# Altium PCB Spinn5PowerCurrentShunt.PcbDoc
Units mil, origin at the board's own origin, x right, y up, seen from the top; angles counter-clockwise.
Board outline 930 x 1995 mil, 2 copper layers (Top Layer, Bottom Layer); 14 components, 8 nets, 62 pads, 0 vias.
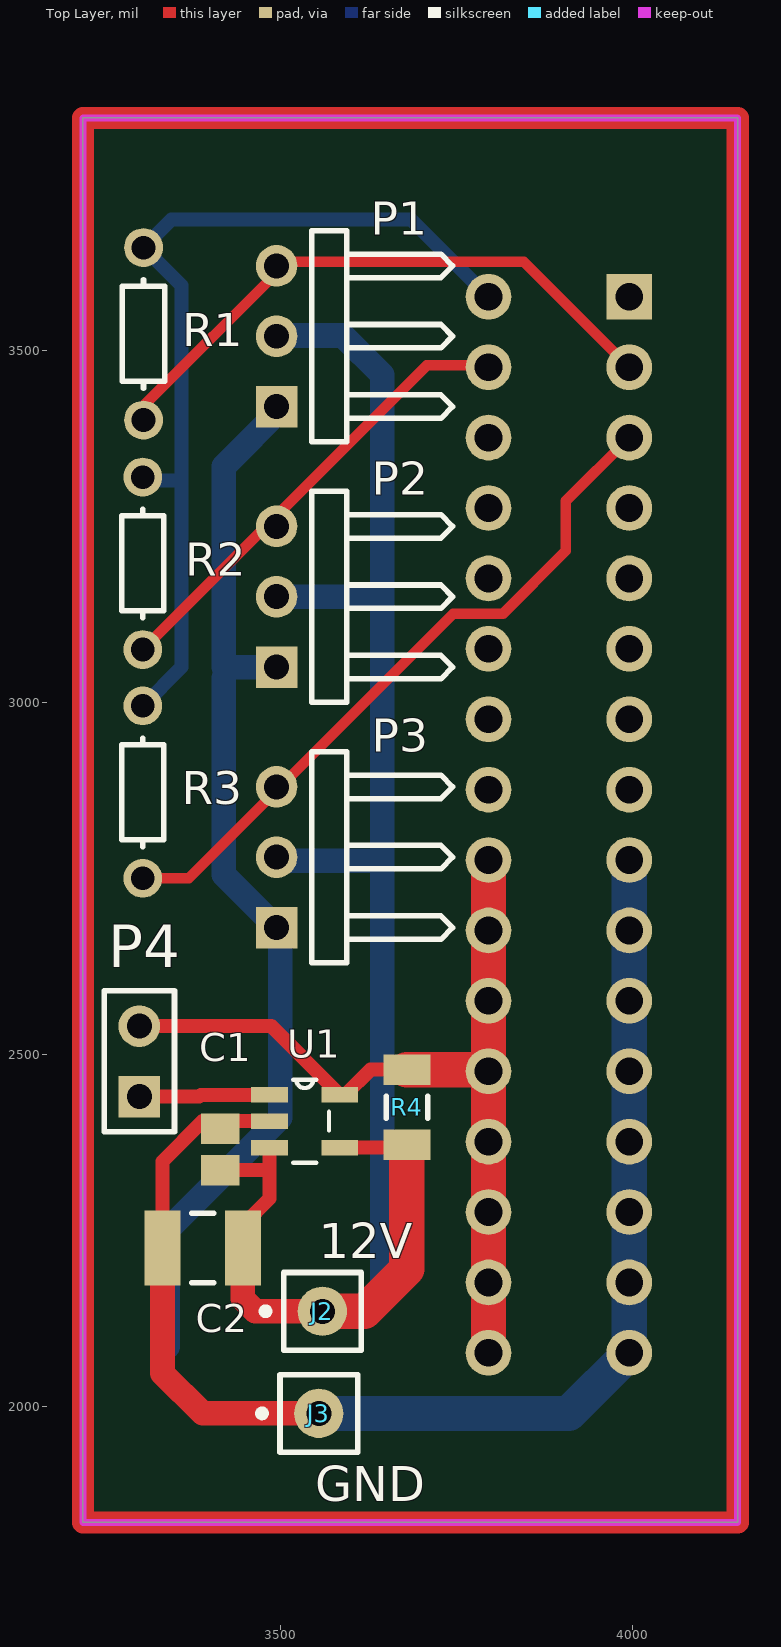
[diagram p0: Top Layer view]
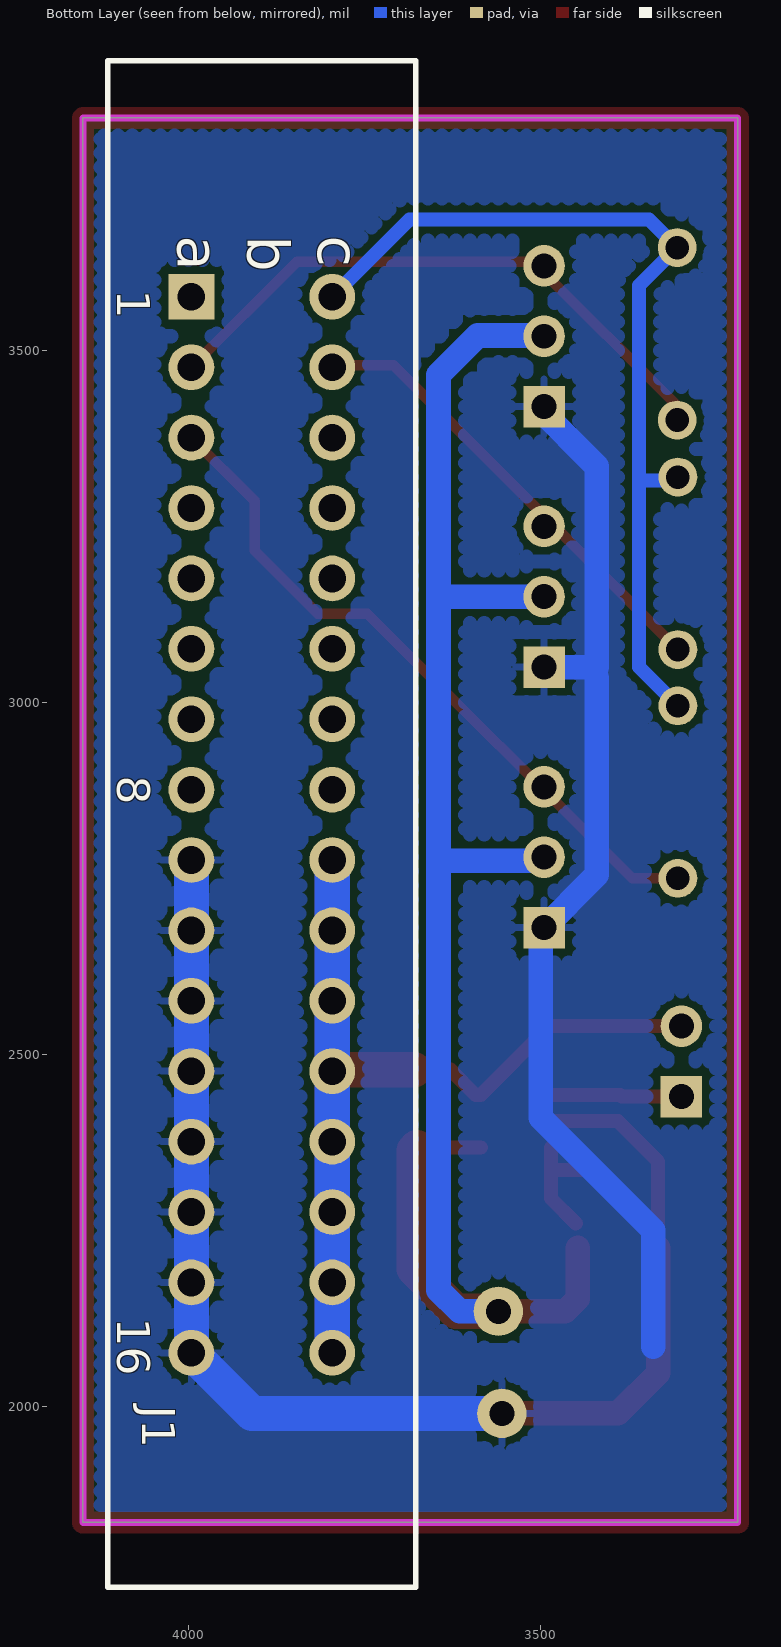
[diagram p1: Bottom Layer view, seen from below]
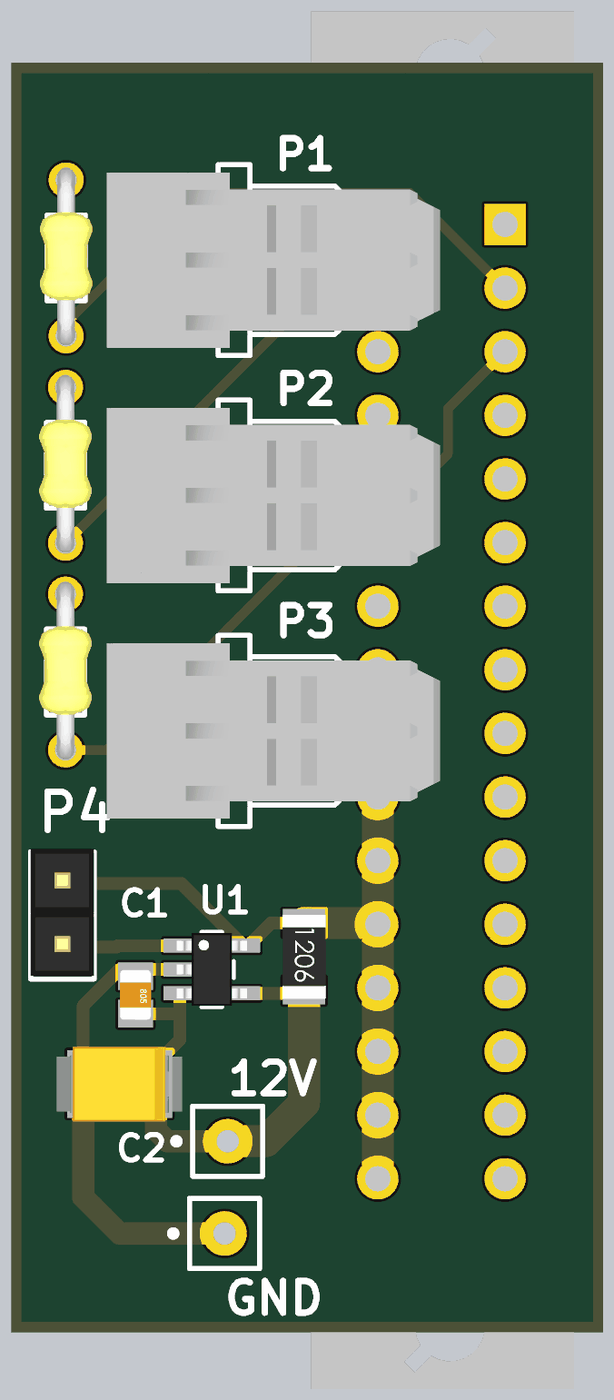
[diagram p2: 3D render of the assembled board from above, using the file's embedded part models]

## Layer stack, top to bottom
Top Solder: solder mask 0.4, Solder Resist, Dk 3.5
Top Layer: signal copper 1.4
Dielectric 1: dielectric 12.6, FR-4, Dk 4.8
Bottom Layer: signal copper 1.4
Bottom Solder: solder mask 0.4, Solder Resist, Dk 3.5

## Board outline
3220,1835 3220,3830 4150,3830 4150,1835

## Design rules (kind name [scope] priority, off if disabled: settings)
Clearance [All] p1: gap=10
MinimumSolderMaskSliver [All] p1: minsoldermaskwidth=7
PolygonConnect [All] p1: connectstyle=Relief reliefconductorwidth=10 reliefentries=4 polygonreliefangle="90 Angle" airgapwidth=10
RoutingVias [All] p1: holewidth=28 width=50 viastyle="Through Hole" minholewidth=28 minwidth=50 maxholewidth=28 maxwidth=50
SilkToSolderMaskClearance [IsPad] p1: minsilkscreentomaskgap=8 clearancetoexposedcopper=TRUE
SolderMaskExpansion [All] p1: expansion=4
Width [All] p1: maxlimit=50 minlimit=10 preferedwidth=10 minimp=50.000000 maximp=50.000000 favimp=50.000000
28 further rules are at their usual default settings.

## Components (designator, comment, footprint, x,y, rotation, side; value= is the part's Value field where it differs from the comment)
C1 "Cap" C0805 3415,2365 r270 top
C2 "Cap Pol1" C1210_N 3390,2225 r180 top
J1 "09 23 248 6824" 0923248X824 3896,2826 r270 bottom
J2 "Socket" PIN1 3560,2135 r90 top
J3 "Socket" PIN1 3555,1990 r90 top
P1 "Header 3H" HDR1X3H 3495,3420 r90 top
P2 "Header 3H" HDR1X3H 3495,3050 r90 top
P3 "Header 3H" HDR1X3H 3495,2680 r90 top
P4 "Header 2" HDR1X2 3300,2440 r90 top
R1 "Res1" AXIAL-0.3 3306,3491 r90 top
R2 "Res1" AXIAL-0.3 3305,3165 r90 top
R3 "Res1" AXIAL-0.3 3305,2840 r90 top
R4 "Res1" C1206 3680,2425 r270 top
U1 "MAX4376FAUK+" 21-0057F 3535,2405 r0 top

## Footprints (in the part's own frame and the unit in brackets; to place one, negate y for a bottom-side part, rotate by r counter-clockwise, add the part's x,y. Pads: shape width x height; smd on the part's side, far side on the other; paste and mask are expansions set on the pad)
21-0057F [mil]
  rect 52x22 smd: 1(-50,37.4) 2(-50,0) 3(-50,-37.4) 4(50,-37.4) 5(50,37.4)
  silkscreen extent -16,-59 34,59, body extent -55,-57 55,57, height 57
0923248X824 [mm] "Connector; DIN 41612, Type 2C, Thru-Hole; Rows a+b+c, 48 Position; Vertical"
  rect 1.65x1.65 hole 1: A1(-19.05,-2.54)
  round 1.65 hole 1: A2(-16.51,-2.54) A3(-13.97,-2.54) A4(-11.43,-2.54) A5(-8.89,-2.54) A6(-6.35,-2.54) A7(-3.81,-2.54) A8(-1.27,-2.54) A9(1.27,-2.54) A10(3.81,-2.54) A11(6.35,-2.54) A12(8.89,-2.54) A13(11.43,-2.54) A14(13.97,-2.54) A15(16.51,-2.54) A16(19.05,-2.54) C1(-19.05,2.54) C2(-16.51,2.54) C3(-13.97,2.54) C4(-11.43,2.54) C5(-8.89,2.54) C6(-6.35,2.54) C7(-3.81,2.54) C8(-1.27,2.54) C9(1.27,2.54) C10(3.81,2.54) C11(6.35,2.54) C12(8.89,2.54) C13(11.43,2.54) C14(13.97,2.54) C15(16.51,2.54) C16(19.05,2.54)
  silkscreen extent -27.56,-5.55 27.5,5.55, body extent -27.56,-5.29 27.44,5.21, height 11.59
AXIAL-0.3 [mm] "Axial Device, Thru-Hole; 2 Leads; 0.3 in Pin Spacing"
  round 1.4 hole 0.85: 1(-2.286,0) 2(3.937,0)
  silkscreen extent -1.14,-0.76 2.77,0.76, body extent -2.66,-1.05 4.44,1.05, height 1.75
C0805 [mm] "Chip Capacitor, Body 2.0x1.3mm, IPC High Density"
  rect 1.1x1.4 smd: 1(-0.75,0) 2(0.75,0)
  body extent -1,-0.62 1,0.63, height 0.78
C1206 [mm] "Chip Capacitor, Body 3.2x1.6mm, IPC High Density"
  rect 1.1x1.7 smd: 1(-1.35,0) 2(1.35,0)
  silkscreen extent -0.4,-0.75 0.4,0.75, body extent -1.67,-0.86 1.68,0.87, height 0.85
C1210_N [mm] "Chip Capacitor, Body 3.2x2.5mm, IPC Medium Density"
  rect 1.3x2.7 smd: 1(-1.45,0) 2(1.45,0)
  silkscreen extent -0.4,-1.25 0.4,1.25, body extent -2.49,-1.5 2.51,1.5, height 2.11
HDR1X2 [mm] "Connector; Header; 2 Position"
  rect 1.5x1.5 hole 0.9: 1(0,0)
  round 1.5 hole 0.9: 2(2.54,0)
  silkscreen extent -1.27,-1.27 3.81,1.27, body extent -1.14,-1.27 3.94,1.27, height 8.48
HDR1X3H [mm] "Connector; Header; 3 Position; Right Angle"
  rect 1.5x1.5 hole 0.9: 1(0,0)
  round 1.5 hole 0.9: 2(2.54,0) 3(5.08,0)
  silkscreen extent -1.27,-6.35 6.35,-1.27, body extent -0.96,-10.13 6.04,3.18, height 6.33
PIN1 [mil] "Connector; Plug"
  round 70 hole 35.43: 1(0,0)
  silkscreen extent -55,-55 55,86

## Part data
C1: library part "Cap Semi", "Capacitor (Semiconductor SIM Model)"
C2: "Polarized Capacitor (Radial)"
J1: "Eurocard DIN 41612, Type 2C, Half Size, 48 Position, Rows a+b+c, Performance level 2, Female, Lead 2.9 mm, Pitch 2.54 mm"
P1 P2 P3: "Header, 3-Pin, Right Angle"
P4: "Header, 2-Pin"
R1 R2 R3 R4: "Resistor"
U1: "Imported"

## Nets (pads, with @x,y where several pads share a name; then routed paths per layer and width w, separated by ;. In a path a pad name is that pad's centre, name@x,y a point inside that pad or via, vN(x,y) a via of type N, cw(c..) or ccw(c..) an arc to the next point about the centre after c; other vN are vias at no path point)
12V_B: J1.C9 J1.C10 J1.C11 J1.C12 J1.C13 J1.C14 J1.C15 J1.C16 P4.2 R4.1 U1.5 | length 1951.2
  Top Layer w20: P4.2 3487.4,2540 U1.5 3592.4,2442.4 3628.15,2478.15 R4.1
  Top Layer w50: R4.1 J1.C12@3796,2478.15 ; J1.C16 J1.C15 J1.C14 J1.C13 J1.C12 J1.C12@3796,2478.15 ; J1.C9 J1.C10 J1.C11 J1.C12@3796,2478.15
  Bottom Layer w50: J1.C16 J1.C15 J1.C14 J1.C13 J1.C12 J1.C11 J1.C10 J1.C9
+3V: J1.C1 R1.2 R2.2 R3.2 | length 1297.3
  Bottom Layer w20: R3.2 3360,3050 3360,3592 R1.2 3346,3686 3686,3686 J1.C1 ; R2.2@3311,3315 3360,3315
+12V: C1.2 C2.1 J2.1 P1.2 P2.2 P3.2 R4.2 U1.3 U1.4 | length 2644.9
  Top Layer w20: C1.2@3420,2335.47 3483.17,2335.47 3485,2337.3 ; C2.1@3450,2260 3485,2295 3485,2337.3 ; U1.3 3485,2337.3 ; U1.4 R4.2@3675.75,2367.6
  Top Layer w35: C2.1 3447.09,2152.91 3465,2135 J2.1
  Top Layer w50: J2.1 3620,2135 3680,2195 3680,2363.35 R4.2@3675.75,2367.6
  Bottom Layer w35: P2.2 3645,3150 ; P3.2@3500,2775 3645,2775 ; P1.2@3506,3521 3589,3521 3645,3465 3645,2775 ; J2.1 3615,2135 3645,2165 3645,2775
ADC: P4.1 U1.1 | length 186
  Top Layer w20: P4.1 3385,2440 3387.4,2442.4 U1.1
GND: C1.1 C2.2 J1.A9 J1.A10 J1.A11 J1.A12 J1.A13 J1.A14 J1.A15 J1.A16 J3.1 P1.1 P2.1 P3.1 U1.2 | length 3419.9
  Top Layer w20: C2.2 3332.91,2347.91 3390,2405 U1.2
  Top Layer w35: C2.2 3332.91,2047.09 3390,1990 J3.1
  Bottom Layer w35: 3340,2085 3340,2250 3500,2410 3500,2675 3420,2755 3420,3035 ; P2.1@3485,3050 3420,3050 3420,3335 P1.1@3506,3421
  Bottom Layer w50: J3.1 3910,1990 J1.A16 J1.A15 J1.A14 J1.A13 J1.A12 J1.A11 J1.A10 J1.A9
SENSE1: J1.A2 P1.3 R1.1 | length 859.9
  Top Layer w15: R1.1 3306,3421 P1.3@3506,3621 ; P1.3@3506,3625.98 3846.02,3625.98 J1.A2
  Bottom Layer w15: P1.3@3506,3621 P1.3@3506,3625.98
SENSE2: J1.C2 P2.3 R2.1 | length 655.6
  Top Layer w15: R2.1 3708.5,3478.5 J1.C2@3793.5,3478.5
SENSE3: J1.A3 P3.3 R3.1 | length 991.7
  Top Layer w15: R3.1 3370,2750 3745.98,3125.98 3816.66,3125.98 3906,3215.32 3906,3286 J1.A3
pads on no net: J1.A1 J1.A4 J1.A5 J1.A6 J1.A7 J1.A8 J1.C3 J1.C4 J1.C5 J1.C6 J1.C7 J1.C8
copper on no net: | length 5850
  Top Layer w31.5: 3220,1835 4150,1835 4150,3830 3220,3830 3220,1835

## Polygon pours and split planes (outlines as drawn)
GND on Bottom Layer "GND pour" (hatched 90Degree grid 20 track 20, pour order 2): 3235,1855 4130,1855 4130,3810 3235,3810

## Keep-outs
Keep-Out Layer:
  the board outline again, w10

## Silkscreen, mask and mechanical layers (free items; w line width, h text height)
Top Overlay:
  text "12V" at 3555,2210 h50
  text "GND" at 3550,1865 h50
Bottom Solder:
  text "ADC" at 3400,2600 h35 r90
  text "Vs" at 3405,2455 h35 r90
  text "12V" at 3480,2185 h35 r90
  text "GND" at 3480,2035 h35 r90
Mechanical 1:
  lines w10: 3231,1849.11 3231,3817.61 4136.51,3817.61 4136.51,1849.11 3231,1849.11

## Text inside footprints (layer, text, board x,y; h text height)
J1: Bottom Overlay "16" at 4101,2126 h47.24 r90; Bottom Overlay "8" at 4101,2896 h47.24 r90; Bottom Overlay "c" at 3815.68,3663.01 h59.06 r90; Bottom Overlay "b" at 3915.68,3663.01 h59.06 r90; Bottom Overlay "a" at 4015.68,3663.01 h59.06 r90; Bottom Overlay "1" at 4101,3586 h47.24 r90